# EAGLE board spring_2020_swarm (EAGLE 9.5.2)
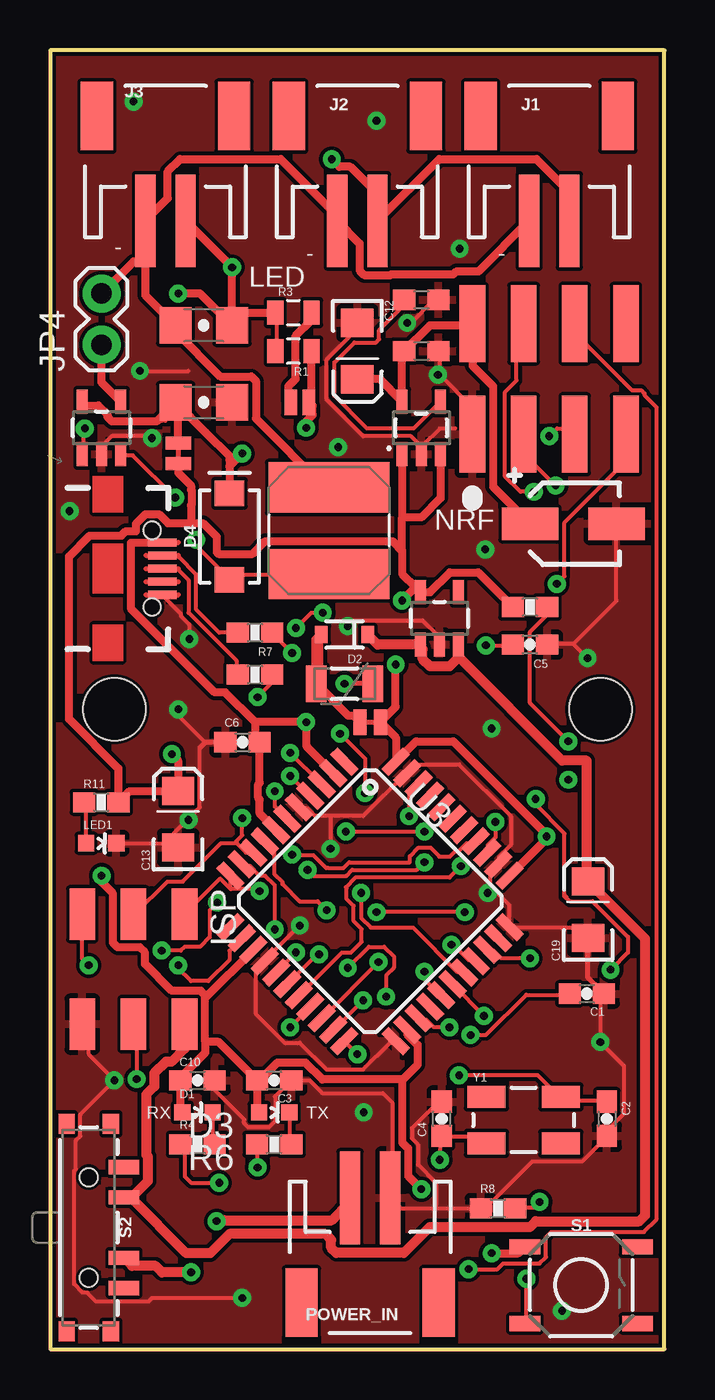
[diagram p0: board, top side]
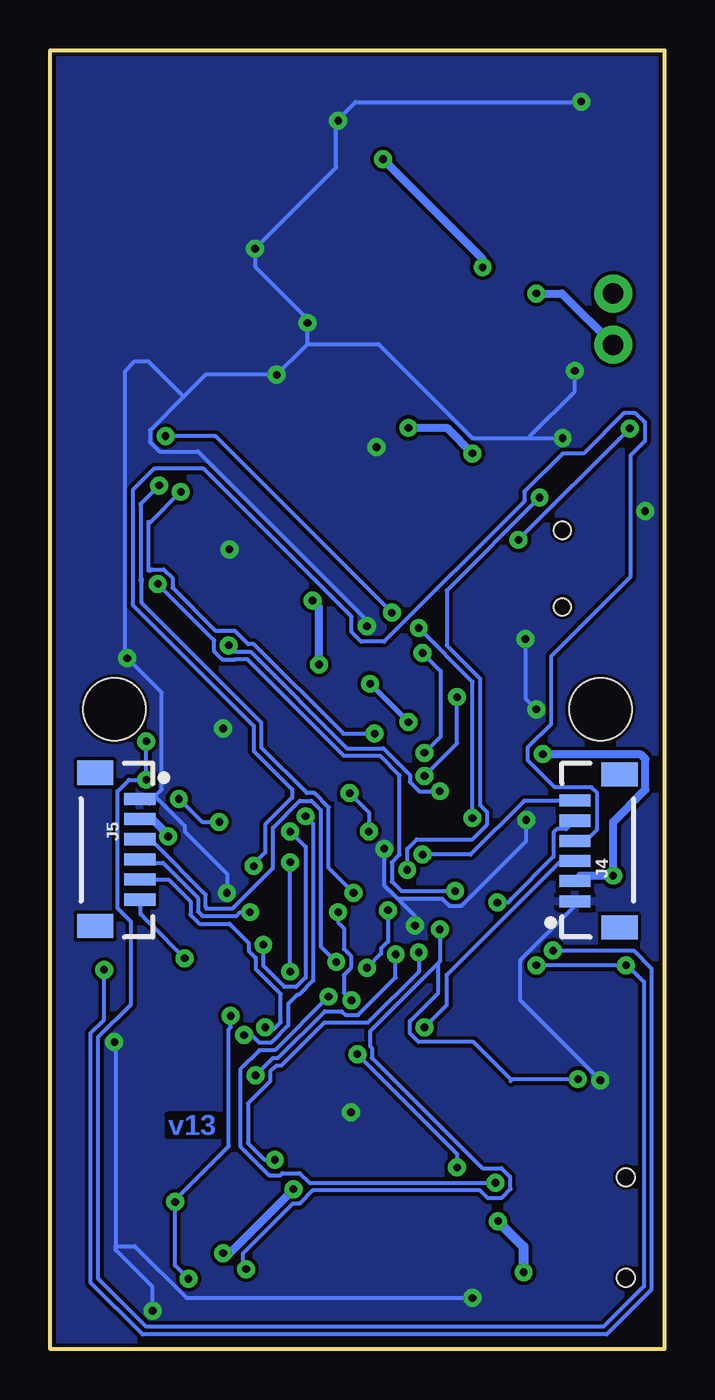
[diagram p1: board, bottom side, seen from below]

Size 30.48 x 64.45 mm. Coordinates in mm from the lower left corner, seen from the top.
Outline: 0,64.45 0,0 30.48,0 30.48,64.45 0,64.45
Copper layers (1*16): Top 0.035mm / dielectric 1.5mm / Bottom 0.035mm
Design rules "SparkFun *": minimum track width 8mil, minimum drill 15mil, track to track 7mil, track to pad 7mil, pad to pad 7mil, via to via 7mil, smd to smd 7mil, copper to edge 7mil, drill to drill 7mil, minimum pad ring 12mil, minimum via ring 10mil, stop-mask expansion 4mil, vias tented up to drill 20mil, thermal gap 10mil
Net classes: 1 power: width 0.508 mm
Holes 3.1 mm at 27.3,31.75 3.17,31.75

## Footprints (pad centres in the part's own frame; a part is rotated, then mirrored left to right if it is on the bottom)
0603-CAP = smd 1.1 x 1: 1 -0.85,0; 2 0.85,0
1206-CAP = smd 1.6 x 1.8: 1 -1.4,0; 2 1.4,0
0603 = smd 1.1 x 1: 1 -0.85,0; 2 0.85,0
EIA3216 = smd 1.4 x 1.6: A 1.4,0; C -1.4,0
LED-0603 = smd 0.8 x 0.8: A 0,-0.75; C 0,0.75
SOD-323 = smd 0.63 x 0.83: 1 -1.15,0; 2 1.15,0
SMA-DIODE = smd 1.27 x 1.47: A -2.15,0; C 2.15,0
PTC-1206 = smd 1 x 1.8: 1 -1.4,0; 2 1.4,0
2X03SMD = smd 2.54 x 1.27: 1 -2.54,2.54; 2 2.92,2.54; 3 -2.54,0; 4 2.92,0; 5 -2.54,-2.54; 6 2.92,-2.54
JST-2-SMD = smd 1 x 4.6: 1 -1,-3.7; 2 1,-3.7 | smd 1.6 x 3.4: NC1 -3.4,1.5; NC2 3.4,1.5
1X06-1MM = smd 0.6 x 1.55: 1 -2.54,1.27; 2 -1.54,1.27; 3 -0.54,1.27; 4 0.46,1.27; 5 1.46,1.27; 6 2.46,1.27 | smd 1.2 x 1.8: P$1 -3.84,-0.955; P$2 3.76,-0.955
SMT-JUMPER_2_NC_TRACE_NO-SILK = smd 0.635 x 1.27: 1 -0.508,0; 2 0.508,0
1X02 = drill 1.016 pad 1.88: 1 0,0; 2 2.54,0
SRN6045 = smd 2.5 x 6: 1 -2.175,-0.175; 2 2.125,-0.175
0805 = smd 0.8 x 1.2: 1 -0.9,0; 2 0.9,0
0603-RES = smd 1.1 x 1: 1 -0.85,0; 2 0.85,0
TACTILE_SWITCH_SMD_5.2MM = smd 1.524 x 0.762: 1 -2.794,1.905; 2 2.794,1.905; 3 -2.794,-1.905; 4 2.794,-1.905
SWITCH_SP3T_SMD = smd 0.7 x 1.5: 1 3,-1.75; 2 1.5,-1.75; 3 -1.5,-1.75; 4 -3,-1.75 | smd 1 x 0.8: P$1 -5.15,-1.1; P$2 -5.15,1.1; P$3 5.15,1.1; P$4 5.15,-1.1 | hole 0.9: 2.5,0; -2.5,0
PAD-JUMPER-2-NO_NO_SILK = smd 0.635 x 1.27: 1 -0.45,0; 2 0.45,0
SOT23-5 = smd 0.55 x 1.2: 1 -0.95,-1.3; 2 0,-1.3; 3 0.95,-1.3; 4 0.95,1.3; 5 -0.95,1.3
TQFP44 = smd 1.5 x 0.5: 1 -5.8,4; 2 -5.8,3.2; 3 -5.8,2.4; 4 -5.8,1.6; 5 -5.8,0.8; 6 -5.8,0; 7 -5.8,-0.8; 8 -5.8,-1.6; 9 -5.8,-2.4; 10 -5.8,-3.2; 11 -5.8,-4; 23 5.8,-4; 24 5.8,-3.2; 25 5.8,-2.4; 26 5.8,-1.6; 27 5.8,-0.8; 28 5.8,0; 29 5.8,0.8; 30 5.8,1.6; 31 5.8,2.4; 32 5.8,3.2; 33 5.8,4 | smd 0.5 x 1.5: 12 -4,-5.8; 13 -3.2,-5.8; 14 -2.4,-5.8; 15 -1.6,-5.8; 16 -0.8,-5.8; 17 0,-5.8; 18 0.8,-5.8; 19 1.6,-5.8; 20 2.4,-5.8; 21 3.2,-5.8; 22 4,-5.8; 34 4,5.8; 35 3.2,5.8; 36 2.4,5.8; 37 1.6,5.8; 38 0.8,5.8; 39 0,5.8; 40 -0.8,5.8; 41 -1.6,5.8; 42 -2.4,5.8; 43 -3.2,5.8; 44 -4,5.8
2.54MM = smd 3.81 x 1.27: 1 0,0; 2 -5.486,0; 3 0,2.54; 4 -5.486,2.54; 5 0,5.08; 6 -5.486,5.08; 7 0,7.62; 8 -5.486,7.62
PANASONIC-CAP-SMD-C = smd 1.6 x 2.794: NEG 0,4.294; POS 0,0
USB-AB-MICRO-SMD-V03-IN&OUT = smd 1.4 x 0.4: D+1 2.7,0; D-1 2.7,0.65; GND1 2.7,-1.3; ID1 2.7,-0.65; VBUS1 2.7,1.3 | hole 0.85: 2.2,1.9; 2.2,-1.9
CRYSTAL-SMD-5X3 = smd 1.9 x 1.1: 1 -1.85,-1.15; 2 1.85,-1.15; 3 1.85,1.15; 4 -1.85,1.15

## Placement (x,y rotation side)
C1  0.1uF  [0603-CAP]  26.63,17.64 180 top
C2  22pF  [0603-CAP]  27.62,11.43 270 top
C3  0.1uF  [0603-CAP]  11.11,13.34 180 top
C4  22pF  [0603-CAP]  19.43,11.43 90 top
C5  1uF  [0603-CAP]  23.81,34.96 180 top
C6  1uF  [0603-CAP]  9.54,30.11 0 top
C7  1uF  [1206-CAP]  7.62,50.8 180 top
C8  2.2uF  [1206-CAP]  7.62,46.99 0 top
C9  0.1uF  [0603]  18.41,49.53 0 top
C10  1uF  [0603-CAP]  7.3,13.34 0 top
C11  4.7uF  [0603]  18.41,52.07 0 top
C12  10uF  [EIA3216]  15.24,49.53 270 top
C13  10uF  [EIA3216]  6.34,26.3 90 top
C19  10uF  [EIA3216]  26.69,21.8 90 top
D1  Yellow  [LED-0603]  7.3,11.75 270 top
D2  [SOD-323]  14.61,35.46 180 top
D3  Green  [LED-0603]  11.11,11.75 270 top
D4  3A/40V/500mV  [SMA-DIODE]  8.89,40.32 90 top
F1  500mA  [PTC-1206]  14.61,33.02 180 top
ISP  [2X03SMD]  4.13,19.05 270 top
J1  [JST-2-SMD]  24.77,59.69 0 top
J2  [JST-2-SMD]  15.24,59.69 0 top
J3  [JST-2-SMD]  5.71,59.69 0 top
J4  [1X06-1MM]  3.17,24.77 90 bottom
J5  [1X06-1MM]  27.3,24.77 270 bottom
JP3  JUMPER-SMT_2_NC_TRACE_NO-SILK  [SMT-JUMPER_2_NC_TRACE_NO-SILK]  6.35,44.45 270 top
JP4  [1X02]  2.54,49.85 90 top
JP5  JUMPER-SMT_2_NC_TRACE_NO-SILK  [SMT-JUMPER_2_NC_TRACE_NO-SILK]  15.88,31.12 0 top
L1  33uH  [SRN6045]  13.65,40.64 90 top
LED1  Red  [LED-0603]  2.53,25.11 270 top
POWER_IN  [JST-2-SMD]  15.88,3.81 180 top
R1  0.3R  [0805]  12.06,49.53 180 top
R2  10K  [0603-RES]  23.81,36.83 180 top
R3  0.3R  [0805]  12.06,51.44 0 top
R4  330  [0603-RES]  7.3,10.16 0 top
R5  22  [0603-RES]  10.16,33.47 180 top
R6  330  [0603-RES]  11.11,10.16 0 top
R7  22  [0603-RES]  10.16,35.56 180 top
R8  10k  [0603-RES]  22.23,6.99 0 top
R11  1K  [0603-RES]  2.53,27.13 0 top
S1  MOMENTARY-SWITCH-SPST-SMD-5.2MM  [TACTILE_SWITCH_SMD_5.2MM]  26.35,3.18 0 top
S2  [SWITCH_SP3T_SMD]  1.9,6.03 90 top
SJ2  NO Jumper  [PAD-JUMPER-2-NO_NO_SILK]  12.38,46.99 180 top
U1  AL8805  [SOT23-5]  2.54,45.72 0 top
U2  MIC5219  [SOT23-5]  19.31,36.27 0 top
U3  32U4  [TQFP44]  15.88,22.23 315 top
U4  3.3V/150mA  [SOT23-5]  18.41,45.72 0 top
U$4  NRFHEADSMD  [2.54MM]  20.95,45.4 270 top
U$5  33uF  [PANASONIC-CAP-SMD-C]  23.81,40.96 270 top
X1  [USB-AB-MICRO-SMD-V03-IN&OUT]  2.86,38.73 0 top
Y1  16MHz  [CRYSTAL-SMD-5X3]  23.5,11.37 0 top

## Library data of the parts
C1-C6 C10 C12 C13 C19 D1-D3 F1 LED1 R2 R4-R8 R11 U2 Y1 = SparkFun
C7 C8 = SparkFun-Capacitors
C9 = SparkFun-Capacitors; PROD_ID: CAP-08604
C11 = SparkFun-Capacitors; PROD_ID: CAP-08280
D4 = SparkFun-DiscreteSemi; PROD_ID: DIO-09886
ISP = fab
J1-J3 POWER_IN = SparkFun-Connectors; PROD_ID: CONN-11443; SF_ID: PRT-08612
J4 J5 = SparkFun-Connectors; PROD_ID: CONN-08249; SF_ID: GPS-00579
JP3 JP5 = SparkFun-Jumpers
JP4 = SparkFun-Connectors
L1 = SparkFun-Passives; PROD_ID: NDUC-11627
R1 R3 = SparkFun-Resistors; PROD_ID: RES-11622
S1 = SparkFun-Switches; PROD_ID: SWCH-08247; SF_SKU: COM-08720
S2 = SparkFun-Switches; PROD_ID: SWCH-10805
SJ2 = SparkFun-Passives
U1 = SparkFun-PowerIC; PROD_ID: IC-11626
U3 = SparkFun-IC-Microcontroller; PROD_ID: IC-11161
U4 = SparkFun-IC-Power; PROD_ID: VREG-00822
U$4 = nrf
U$5 = talkingdrums
X1 = Testing

## Nets
3.3V: C9.1 C12.A U4.5 U$4.2 U$5.POS
A0: J4.5 U3.36
A1: J4.6 U3.37
A2: U3.38
A3: U3.39
A4: U3.40
A5: U3.41
AREF: C1.2 U3.42
D2: J4.3 U3.19
D3: J4.4 U3.18
D4: J5.5 U3.25
D5: J5.6 U3.31
D6/CTRL_CH1: U1.3 U3.27
D7: U3.1
D8/SWITCH: R8.2 S1.3 U3.28
D9/CE: U3.29 U$4.3
D10/CSN: U3.30 U$4.4
D11: U3.12
D12: U3.26
D13: U3.32
D+: R5.1 U3.4
D-: R7.1 U3.3
GND: C1.1 C2.2 C3.1 C4.2 C5.1 C6.1 C8.2 C9.2 C10.2 C11.2 C12.C C13.C C19.C ISP.6 J4.1 J5.1 LED1.C POWER_IN.1 R8.1 U1.2 U2.2 U3.5 U3.15 U3.23 U3.33 U3.35 U3.43 U4.2 U$4.1 U$5.NEG X1.GND1
MISO: ISP.1 U3.11 U$4.7
MOSI: ISP.4 U3.10 U$4.6
N$1: C4.1 U3.16 Y1.1
N$2: C2.1 U3.17 Y1.3
N$3: D2.2 F1.2 JP5.1
N$4: C5.2 U3.6
N$5: D1.C R4.2
N$6: R7.2 X1.D-1
N$7: D3.C R6.2
N$8: R5.2 X1.D+1
N$9: R3.2 SJ2.2
N$12: R4.1 U3.8
N$13: C11.1 U4.4
N$38: LED1.A R11.1
OUT+: C7.1 J1.2 J2.2 J3.2 JP4.1 R1.2 R3.1 U1.4
OUT-: C7.2 J1.1 J2.1 J3.1 JP4.2 L1.2
RAW [power]: C19.A D2.1 ISP.2 S2.2 U2.1 U2.3
RAW_IN: POWER_IN.2 S2.3
RESET: ISP.5 R2.1 U3.13
RXI: J5.3 U3.20
SCK: ISP.3 U3.9 U$4.5
SW: D4.A L1.1 U1.1
TXLED: R6.1 U3.22
TXO: J5.4 U3.21
UVCC: C6.2 F1.1 U3.2 U3.7 X1.VBUS1
VCC: C3.2 C10.1 C13.A D1.A D3.A J4.2 J5.2 JP3.2 JP5.2 R2.2 R11.2 S1.1 U2.5 U3.14 U3.24 U3.34 U3.44 U4.1 U4.3
VIN: C8.1 D4.C JP3.1 R1.1 SJ2.1 U1.5

## Tracks (layer width: path | path; a pad name or v marks a point on that pad's centre or on a via)
3.3V
  Top 0.406: C12.A 16.36,48.13 U4.5 17.46,49.43 C9.1 18.84,50.8 20.95,50.8 U$4.2 20.95,48.8 21.97,47.78 21.97,42.8 U$5.POS
A0  (via drill 0.38)
  Top 0.203: v22.1,26.16 22.1,25.4 21.72,25.02 21.72,24.64 U3.36 | v24.1,27.3 24.1,27.02 25.53,25.59 25.53,22.54 | 25.53,22.45 25.53,22.54 | v5.52,19.78 6.48,19.78 6.67,19.97 7.43,19.97 7.91,20.45 7.91,21.78 v8.29,22.16 | 25.53,22.54 25.61,22.46 25.61,22.39 25.78,22.22 26.92,22.22 28.68,20.46 28.68,19.69 v27.82,18.83 v27.81,18.83
  Bottom 0.203: v22.1,26.16 22.95,26.16 v24.1,27.3 | v27.81,18.83 27.81,16.35 28.48,15.68 28.48,3.3 25.91,0.73 2.86,0.73 0.63,2.95 0.63,18.89 1.52,19.78 v5.52,19.78 | 4.48,26.16 J4.5 4.87,25.8 5.34,25.8 5.5,25.64 5.5,24.45 7.62,22.33 7.62,22.29 7.74,22.16 v8.29,22.16
A1  (via drill 0.38)
  Top 0.203: U3.37 21.05,25.11 20.67,25.11 20.25,24.7 20.08,24.7 19.84,24.45 19.31,24.45 18.87,24.89 18.27,24.89 17.85,24.46 17.85,24.16 14.83,24.16 14.54,23.88 13.97,23.88 13.81,23.88 13.69,23.88 13.06,24.51 12.04,24.51 v12,24.54
  Bottom 0.203: v12,24.54 9.62,24.54 6.95,27.21 4.48,27.21 J4.6
AREF  (via drill 0.38)
  Top 0.203: v20.86,15.59 21.62,15.59 23.62,17.59 25.72,17.59 C1.2 | v17.81,26.45 17.81,27.59 18.19,27.97 U3.42
  Bottom 0.203: v20.86,15.59 20.48,15.59 20.1,15.21 19.53,15.21 18.67,16.07 18.67,17.14 18.22,17.59 18.13,17.59 17.43,18.29 17.43,26.07 v17.81,26.45
D2  (via drill 0.38)
  Top 0.203: v11.91,15.97 12.86,16.92 U3.19
  Bottom 0.203: v11.91,15.97 10.79,17.08 10.79,18.57 5.14,24.23 J4.3
D3  (via drill 0.38)
  Top 0.203: v20.38,23.97 19.81,23.4 15.14,23.4 14.67,22.92 14.71,22.88 14.71,22.34 15.05,22 15.05,21.24 15.45,20.84 15.45,20.21 14.92,19.69 14.47,19.69 U3.18 12.38,17.59
  Bottom 0.203: J4.4 4.38,25.3 3.81,25.3 3.33,25.78 3.33,27.59 3.62,27.88 5.43,27.88 6.76,29.21 6.76,29.88 5.62,31.02 5.62,34.38 1.68,38.33 1.68,44.36 0.95,45.09 0.95,45.97 1.43,46.45 2,46.45 4,44.45 5.05,44.45 6.95,42.55 6.95,42.07 13.91,35.12 15.05,35.12 15.53,35.59 15.53,36.35 22.86,43.69 25.34,43.69 26.38,42.64 26.38,36.92 20.38,30.92 20.38,29.69 18.48,27.78 18.48,27.37 19.81,26.03 19.81,24.64 20.38,24.07 v20.38,23.97
D4  (via drill 0.38)
  Top 0.203: v19.81,15.97 19.05,15.97 18.67,16.35 18.29,16.35 U3.25
  Bottom 0.203: 26.04,23.15 J5.5 | 25.34,23.11 26,23.11 J5.5 | J5.5 24.61,23.3 23.53,22.23 23.53,21.56 23.08,21.11 21.59,21.11 20.63,20.16 20.63,19.77 20.29,19.42 20.29,18.86 19.05,17.62 19.05,16.22 19.38,15.89 19.46,15.97 v19.81,15.97
D5  (via drill 0.38)
  Top 0.203: v23.81,19.4 22.38,19.4 22,19.78 21.72,19.78 U3.31
  Bottom 0.203: v23.81,19.4 25.59,21.17 25.62,21.21 26,21.59 26,22.26 J5.6
D6/CTRL_CH1  (via drill 0.38)
  Top 0.203: v6.19,42.26 4.1,44.36 3.52,44.36 U1.3 | v18.57,18.73 18.57,18.35 19.34,17.59 U3.27 | v12.76,23.78 13.05,23.5 14.7,23.5 14.99,23.78 18.19,23.78 v18.57,24.16
  Bottom 0.203: v12.76,23.78 12.76,24.83 12.29,25.3 9.53,25.3 8.84,25.99 8.84,26.01 8.8,26.05 8.8,26.65 9.14,27 9.14,33.27 10.79,34.92 10.79,37.66 v6.19,42.26 | v18.57,18.73 v18.57,24.16
D8/SWITCH  (via drill 0.38)
  Top 0.203: v24.29,7.3 24,7.02 23.15,7.02 R8.2 | v23.62,3.49 23.62,1.3 S1.3 | v21.53,16.54 20,18.07 U3.28
  Bottom 0.203: v23.62,3.49 24.29,4.16 v24.29,7.3 24.29,7.4 21.62,10.07 21.62,15.88 21.53,15.97 v21.53,16.54
D9/CE  (via drill 0.38)
  Top 0.203: v15.43,22.64 15.43,21.4 15.91,20.92 18,20.92 20.19,18.73 20.48,18.73 U3.29 | 23.72,45.5 23.53,45.69 23.53,45.43 U$4.3 23.5,44.45 v25.08,42.86
  Bottom 0.203: 25.08,42.55 v25.08,42.86 26,41.94 26,38.16 25.95,38.1 | 25.95,38.2 25.95,38.1 | v15.43,22.64 16.67,23.88 16.67,26.89 17.37,27.59 17.75,27.59 20,29.84 20,31.08 25.95,37.03 25.95,38.1
D10/CSN  (via drill 0.38)
  Top 0.203: v19.91,20.07 20,20.07 20.77,19.3 21.05,19.3 U3.30 | v14.67,25.69 v18.57,25.69 | v15.62,27.59 15.62,29.3 v14.38,30.54 | 23.2,50.89 U$4.4 23.15,50.83 23.15,48.07 22.57,47.5 22.57,43.31 23.34,42.55 v24,42.55
  Bottom 0.203: v19.91,20.07 19.91,19.02 18.86,17.97 18.29,17.97 17.81,18.45 17.81,24.92 v18.57,25.69 | v14.67,25.69 14.67,26.64 v15.62,27.59 | v14.38,30.54 15.94,30.54 20.38,34.99 20.66,34.99 21.32,35.65 22.28,35.65 24.42,37.79 24.42,38.27 24.85,38.7 25.45,38.7 25.5,38.64 25.62,38.64 25.62,41.02 | 25.62,41.05 25.62,41.02 | v24,42.55 25.53,41.02 25.62,41.02
D+  (via drill 0.38)
  Top 0.203: v10.29,32.35 10.95,33.02 10.95,33.4 R5.1 | v11.91,28.45 12.86,27.5 U3.4
  Bottom 0.203: v10.29,32.35 10.29,30.07 v11.91,28.45
D-  (via drill 0.38)
  Top 0.203: v12,34.54 11.05,35.5 R7.1 | v11.91,29.59 13.43,28.07 U3.3
  Bottom 0.203: v12,34.54 11.11,33.66 11.11,30.38 v11.91,29.59
GND  (via drill 0.38)
  Top 0.203: POWER_IN.1 17.4,6.99 19.14,6.99 | 19.14,6.99 R8.1 21.43,7.02 21.62,7.02 23.91,9.3 26.38,9.3 27.62,10.54 C2.2 27.62,10.64 27.62,10.83 28.48,11.68 28.48,14.07 27.34,15.21 v27.3,15.24 27.34,15.27 27.34,17.78 27.32,17.8 | 6.13,25.11 LED1.C 3.24,25.02 | 6.13,25.11 C13.C | 26.69,19.69 26.69,19.66 | 16.88,9.49 16.88,7.94 | 16.88,7.94 POWER_IN.1 | 6.13,25.11 6.13,25.59 6.83,26.29 | 6.83,26.29 7.42,26.88 7.42,29.84 | 21.95,22.88 21.81,23.02 21.81,23.59 22.19,23.97 U3.35 22.29,24.07 22.29,24.45 22.86,25.02 22.86,26.45 20.29,29.02 18.1,29.02 17.72,28.64 U3.43 17.62,28.54 15.53,26.45 13.91,26.45 | 21.95,22.88 22.77,22.07 22.77,21.02 U3.33 22.86,20.92 26.1,20.92 | 13.91,26.45 13.14,26.45 12.76,26.83 12.38,26.83 U3.5 | 24.73,35.05 24.68,34.99 | 24.68,34.99 C5.1 | v21.72,22.64 21.95,22.88 | ISP.6 1.59,15.72 1.9,15.4 1.9,14.64 3.14,13.4 v3.17,13.34 3.14,13.3 2.86,13.02 | 19.34,48.35 19.34,49.5 | 19.34,48.35 20.95,46.74 U$4.1 20.86,45.27 | C11.2 19.05,52.07 17.91,50.93 v17.72,50.93 | v19.24,48.35 19.34,48.35 | 2.57,44.39 U1.2 2.57,44.45 2.57,44.83 3.05,45.31 4.95,45.31 v5.05,45.21 | 20.1,45.69 19.34,45.69 18.48,44.83 18.48,44.45 U4.2 18.38,44.83 17.91,45.31 15.53,45.31 13.72,47.12 13.72,49.12 15.24,50.64 C12.C | 8.29,47.02 8.89,47.02 8.95,47.02 | v12.38,21.02 10.67,19.3 U3.15 10.57,19.21 10.19,18.83 10.19,16.64 11.62,15.21 12.38,15.21 13.72,13.88 15.53,13.88 16.86,15.21 17.14,15.21 U3.23 | 13.91,26.45 v13.91,24.83 | v26.67,34.29 25.97,34.99 | 25.97,34.99 24.68,34.99 | 25.97,34.99 28.11,37.13 U$5.NEG | X1.GND1 6.48,36.52 6.48,36.39 6.9,35.97 v6.9,35.24 | v6.35,31.75 6.35,31.45 7.69,30.11
  Top 0.203: v14.76,35.88 15.05,36.16 18.48,36.16 19.24,35.4 19.24,35.02 U2.2 | v9.53,2.54 5.05,2.54 4.86,2.35 2.29,2.35 1.83,2.8 1.6,2.8 1.18,3.23 1.18,8.84 1.27,8.93 1.27,10.35 1.48,10.57 1.48,11.64 2.86,13.02 | 2.57,12.73 2.86,13.02 | v6.86,26.26 6.83,26.29 | v4.45,48.55 6.86,48.55 | 19.43,12.07 19.43,12.26 C4.2 19.27,12.28 17.95,10.96 17.95,10.46 18.24,10.17 18.24,9.16 19.14,8.26 19.14,7.02 19.14,6.99 | C10.2 8.19,13.3 8.19,12.83 9.62,11.4 9.62,11.21 9.81,11.02 10.86,11.02 11.14,11.3 11.14,12.54 11.91,13.3 C3.1 | 12.29,13.3 12,13.3 C3.1 | 16.86,9.59 POWER_IN.1 | C3.1 12.87,13.34 13.5,12.7 16.51,12.7 16.98,12.23 16.98,8.04 16.88,7.94
  Top 0.254: C6.1 7.69,30.11 7.42,29.84 | C1.1 27.32,17.8 26.69,18.43 26.69,19.69 C19.C
  Bottom 0.203: v21.72,22.64 21.72,23.59 23.81,25.69 23.81,25.97 25.24,27.4 | 25.24,27.4 25.29,27.45 24.96,27.78 24.96,32.58 v26.67,34.29 26.77,34.26 26.77,48.55 26.29,49.02 25.62,49.02 23.91,47.31 23.86,47.26 | 17.72,49.88 v17.72,50.93 | 17.72,49.88 17.86,49.74 v19.24,48.35 19.34,48.35 22.77,48.35 23.86,47.26 | v12.38,21.02 12.38,21.5 13.38,22.5 | 13.38,22.5 13.91,23.02 v13.91,24.83 | 25.24,27.4 25.57,27.07 25.62,27.12 25.81,27.12 26,27.3 J5.1 | v6.9,35.24 6.9,32.3 v6.35,31.75 | 17.72,51.02 v17.72,50.93 | v14.76,35.88 14.76,36.16 23.15,44.55 25.05,44.55 25.53,45.02 25.53,45.59 23.86,47.26 | v25.4,1.91 25.43,1.97 25.43,3.11 27.24,4.92 27.24,5.02 27.24,5.11 | 27.24,15.21 v27.3,15.24 27.24,15.11 27.24,5.11 | v6.86,26.26 6.86,25.21 10.1,21.97 10.64,21.97 11.02,22.35 13.24,22.35 13.38,22.5 | 6.67,45.21 9.53,45.21 14.19,49.88 17.62,49.88 17.72,49.88 | 6.67,45.21 v5.05,45.21 | v4.45,48.55 4.45,47.53 6.67,45.31 6.67,45.21 | J4.1 4.48,22.16 4.48,21.97 7.14,19.3 7.14,17.3 3.24,13.4 v3.17,13.34 | v4.13,61.91 4.19,61.88 15.33,61.88 16.19,61.02 v16.19,60.96 16.29,60.93 16.29,58.64 20.29,54.64 v20.32,54.61 20.29,54.55 20.29,53.69 17.72,51.12 v17.72,50.93 | v9.53,2.54 23.72,2.54 26.29,5.11 27.15,5.11 27.24,5.11
  other vias: 15.56,11.75 21.59,39.69 21.91,30.8 14.29,44.77 0.95,41.59
  pour Top: -16.51,66.04 39.69,66.04 39.69,-3.81 -16.51,-3.81
  pour Bottom: -26.04,67.95 47.31,67.95 47.31,-6.35 -26.04,-6.35
MISO  (via drill 0.38)
  Top 0.203: ISP.1 8.43,23.35 8.91,22.88 | 8.91,22.88 8.95,22.91 U3.11 | v10.38,22.73 10.29,22.83 8.95,22.83 8.91,22.88 | 28.57,45.02 28.57,45.69 U$4.7 28.57,44.93 28.57,44.07 25.53,41.02 25.53,38.35 v25.15,37.97
  Bottom 0.203: v10.38,22.73 13.05,22.73 13.53,23.21 13.53,24.16 13.14,24.54 13.14,28.48 14.1,29.44 15.91,29.44 20.7,34.23 21.3,34.23 21.32,34.2 21.92,34.2 22.35,34.62 22.35,35.17 v25.15,37.97
MOSI  (via drill 0.38)
  Top 0.203: 26,50.74 26,50.8 U$4.6 | v11.14,20.83 11.14,23.02 10.67,23.5 10.38,23.5 9.91,23.97 9.53,23.97 U3.10 | v4.29,13.4 4.29,15.97 4.19,16.07 ISP.4 | v20.77,3.97 22.19,3.97 22.48,4.25 24.29,4.25 24.6,4.57 24.6,5.55 24.77,5.71 24.87,5.82 29.47,5.82 30.1,6.45 30.1,46.74 29.49,47.35 29.49,47.42 29.33,47.59 28.87,47.59 26,50.45 26,50.64 U$4.6 | 26.05,50.79 U$4.6
  Bottom 0.203: v4.29,13.4 7.62,13.4 | 7.62,7.97 7.64,7.95 | 7.64,7.95 8.1,7.49 8.76,7.49 9.14,7.87 17.45,7.87 18.12,7.21 18.46,7.21 20.93,4.74 20.93,4.13 v20.77,3.97 20.77,4.32 | 7.62,13.3 7.62,13.4 | v11.14,20.83 11.14,19.24 11.22,19.16 | 7.64,7.95 7.66,7.98 7.66,8.55 8.08,8.98 9.04,8.98 14.52,14.45 14.52,14.94 14.61,15.03 14.61,15.78 11.22,19.16 | 7.62,13.4 9.47,15.25 12.21,15.25 12.63,15.67 12.63,16.27 11.22,17.68 11.22,19.16
N$1  (via drill 0.38)
  Top 0.203: Y1.1 21.62,10.26 21.34,10.54 19.43,10.54 C4.1 19.34,10.54 v19.34,9.4 | v12.19,19.69 11.24,18.73 U3.16
  Bottom 0.203: v12.19,19.69 12.19,18.73 14.73,16.19 16.89,16.19 19.02,14.07 19.27,14.07 19.56,13.77 19.56,13.29 20.67,12.18 20.67,10.22 19.84,9.4 v19.34,9.4
N$2  (via drill 0.38)
  Top 0.203: C2.1 27.62,12.35 25.53,12.35 25.43,12.45 Y1.3 25.24,12.54 24.19,13.59 v20.29,13.59 | v13.34,19.59 13.24,19.59 11.81,18.16 U3.17
  Bottom 0.203: v13.34,19.59 13.34,18.45 15.2,16.58 15.83,16.58 16.02,16.77 16.85,16.77 19.18,14.45 19.43,14.45 v20.29,13.59
N$3
  Top 0.203: 13.46,33.02 F1.2 13.43,33.24 13.46,33.27 D2.2
  Top 0.406: JP5.1 15.05,31.43 | 15.05,31.43 14.92,31.43 | 15.05,31.43 14.79,31.43 F1.2
  Top 0.508: 13.43,33.02 13.43,33.24 | F1.2 13.21,35.21 D2.2 | JP5.1 15.33,31.12
N$4  (via drill 0.38)
  Top 0.203: v11.14,27.69 11.14,26.92 11.72,26.35 U3.6 | v21.62,34.92 22.95,34.92 C5.2
  Bottom 0.203: v21.62,34.92 21.3,34.61 20.54,34.61 15.75,29.82 13.95,29.82 12.63,28.51 12.63,28.15 12.17,27.69 v11.14,27.69
N$5
  Top 0.203: D1.C 8.05,10.26 R4.2
N$6
  Top 0.203: 5.8,39.38 X1.D-1 6.38,39.31 7.24,38.45 7.24,36.7 8.38,35.56 R7.2 9.24,35.59 9.24,35.97
N$7
  Top 0.203: D3.C 11.91,11.68 11.91,10.16 R6.2
N$8
  Top 0.203: R5.2 9.24,33.5 9.24,34.16 6.86,36.54 6.86,38.16 6.38,38.64 X1.D+1
N$9
  Top 0.406: SJ2.2 11.82,47.11 11.82,47.78 12.18,48.15 12.18,50.29 12.96,51.07 R3.2
N$12  (via drill 0.38)
  Top 0.203: v16.67,17.49 16.67,18.54 17.05,18.92 17.05,19.49 16.57,19.97 15.81,19.97 v14.76,18.92 | 6.48,10.16 R4.1 6.67,9.95 6.67,8.57 6.98,8.26 v8.38,8.26 | 10.67,25.11 U3.8 11.11,24.73 11.11,23.59 11.52,23.18 11.52,23.08 12.38,22.23 13.27,22.23 v13.72,21.78
  Bottom 0.203: v8.38,8.26 17.62,8.26 18.1,8.73 18.95,8.73 19.05,8.64 19.62,8.64 21.05,10.07 21.05,13.88 20.1,14.83 19.34,14.83 v16.67,17.49 | v13.72,21.78 13.72,20.23 14.06,19.89 14.06,19.63 v14.76,18.92
N$13
  Top 0.203: 14.1,48.89 14.1,47.31 15.72,45.69 18.03,45.69 U4.4 19.34,46.93 | 14.1,48.89 14.1,48.93 | C11.1 17.53,52.07 17.53,51.78 16.32,50.58 16.32,50.11 16.16,49.95 15.09,49.95 14.1,48.96 14.1,48.89
N$38
  Top 0.203: LED1.A 1.78,27.04 R11.1
OUT+  (via drill 0.38)
  Top 0.203: R1.2 11.24,49.59 11.24,51.31 R3.1
  Top 0.406: J1.2 25.77,57.42 24.13,59.05 19.3,59.05 J2.2 16.24,57.33 14.9,58.67 14.35,58.67 v13.97,59.05 | C7.1 v9.02,53.69 J3.2 | U1.4 2.54,47.97 JP4.1 | C7.1 7.43,52.39 v6.35,52.39 | C7.1 9.65,51.44 R3.1
  Bottom 0.406: v13.97,59.05 9.02,54.1 v9.02,53.69 | v6.35,52.39 5.08,52.39 JP4.1
OUT-
  Top 0.406: 4.71,53.98 J3.1 5.83,57.11 5.83,58.45 6.44,59.05 11.43,59.05 14.24,56.24 J2.1 15.36,54.87 15.36,53.53 15.58,53.31 16.9,53.31 16.93,53.34 20.01,53.34 20.16,53.49 21.27,53.49 J1.1 | 4.71,53.98 4.71,52.3 C7.2 6.22,50.48 8.43,48.27 9.98,48.27 10.2,48.05 10.2,46.18 13.62,42.77 L1.2 | JP4.2 4.13,53.98 4.71,53.98
RAW
  Top 0.508: S2.2 3.69,7.5 4.01,7.5 | D2.1 16.25,34.97 U2.1 18.48,34.73 18.48,34.26 18.86,33.88 19.81,33.88 20.27,34.34 | 20.27,34.34 25.4,29.21 26.61,29.21 26.61,23.28 C19.A 29.53,20.37 29.53,6.63 29.25,6.35 24.1,6.35 23.8,6.05 18.83,6.05 17.55,4.78 14.2,4.78 13.94,5.03 13.94,5.42 13.65,5.71 8.89,5.71 7.94,4.76 6.74,4.76 4.01,7.5 | 20.27,34.34 20.26,34.35 U2.3 | 4.15,7.5 4.01,7.5 | 6.67,15.3 ISP.2 6.67,14.92 6.01,14.27 5.72,14.27 5.16,13.71 5.16,13.04 4.76,12.64 4.76,9.64 4.84,9.56 4.84,8.33 4.01,7.5
RAW_IN  (via drill 0.38)
  Top 0.406: POWER_IN.2 14.88,7.3 14.88,6.62
  Top 0.508: S2.3 4.06,4.13 5.22,4.13 5.54,3.81 v6.98,3.81 | v8.25,6.35 8.55,6.35 8.61,6.4 13.97,6.4 14.88,7.3
  Bottom 0.508: v8.25,6.35 6.98,5.08 v6.98,3.81
RESET  (via drill 0.38)
  Top 0.203: ISP.5 1.59,19.37 v1.9,19.05 | 24.73,36.83 R2.1 24.67,36.73 24.67,36.45 23.81,35.59 23.81,32.07 v25.72,30.16 | v25.72,28.26 25.43,28.26 | 9.09,19.97 U3.13 8.89,19.77 8.89,19.32 7.84,18.26 6.98,18.26 6.35,18.9 v6.35,19.05
  Bottom 0.203: v6.35,19.05 v1.9,19.05 1.81,19.02 1.02,18.23 1.02,3.11 3.02,1.11 25.72,1.11 28.1,3.49 28.1,15.49 26.48,17.11 26.48,21.21 27.15,21.88 27.15,27.69 26.57,28.26 v25.72,28.26 v25.72,30.16
RXI  (via drill 0.38)
  Top 0.203: v16.29,19.21 13.53,16.45 U3.20
  Bottom 0.203: 26.04,25.15 J5.3 26,25.11 25.34,25.11 22.77,22.54 22.77,21.97 22.77,21.88 21.43,21.88 19.43,23.88 19.43,25.88 18.1,27.21 17.53,27.21 17.05,26.73 17.05,19.97 v16.29,19.21
SCK  (via drill 0.38)
  Top 0.203: 9.24,25.11 9.71,24.64 10,24.64 U3.9 | 9.24,25.11 8.48,25.11 6.57,23.21 5.81,23.21 4.19,21.59 ISP.3 | v24.77,45.31 25.15,45.69 25.75,45.69 U$4.5 | v13.53,36.54 12.95,36.54 v12.19,35.78 | v9.53,26.35 9.53,25.5 9.24,25.21 9.24,25.11
  Bottom 0.203: v24.77,45.31 22.29,45.31 v13.53,36.54 | v12.19,35.78 9.53,33.12 v9.53,26.35
SW  (via drill 0.38)
  Top 0.203: v1.71,45.69 1.62,45.59 1.62,44.45 U1.1 | v7.24,40.16 7.24,39.88 8.86,38.26 D4.A 8.95,38.26 9.14,38.45 13.81,38.45 L1.1
  Bottom 0.203: v7.24,40.16 v1.71,45.69
TXLED  (via drill 0.38)
  Top 0.203: v10.29,9.02 10.29,10.16 R6.1 | v15.24,14.64 14.67,15.21 U3.22
  Bottom 0.203: v10.29,9.02 10.29,9.68 v15.24,14.64
TXO  (via drill 0.38)
  Top 0.203: v15.53,17.3 14.1,15.88 U3.21 | v20.57,21.69 v16.19,21.69
  Bottom 0.203: v20.57,21.69 21.05,21.69 21.24,21.5 22.92,21.5 23.15,21.72 23.15,22.38 24.89,24.13 25.86,24.13 J5.4 26,24.26 25.43,24.26 | v16.19,21.69 16.19,21.18 15.91,20.89 15.91,19.85 15.56,19.51 15.56,18.91 15.91,18.57 15.91,17.69 v15.53,17.3
UVCC  (via drill 0.38)
  Top 0.254: F1.1 v14.61,33.02 | 13.69,28.93 U3.2 | 10.16,30.48 10.16,30.34 C6.2 10.39,29.84
  Top 0.406: 10.16,31.12 8.68,32.59 8.16,32.59 3.99,36.76 3.99,40.01 5.53,40.01 X1.VBUS1 | 10.16,31.12 10.16,30.48 | 13.69,28.93 12.73,29.89 12.73,29.93 12.7,29.96 v12.7,31.12 10.16,31.12 | U3.7 10.39,26.58 10.39,27.27 10.32,27.34 10.32,28.03 10.39,28.1 10.39,29.84
  Bottom 0.254: v14.61,33.02 v12.7,31.12
VCC  (via drill 0.38)
  Top 0.406: U3.14 7.68,17.43 | 7.68,15.24 7.68,17.43 | 7.68,15.24 7.68,14.7 6.45,13.47 C10.1 6.45,11.85 D1.A | 10.21,13.39 C3.2 10.26,11.85 D3.A | 10.21,13.39 8.36,15.24 7.68,15.24 | U3.24 17.71,15.62 18.24,15.1 18.24,14.11 17.46,13.34 | 17.46,13.34 17.41,13.39 13.5,13.39 12.67,14.22 11.25,14.22 10.43,13.39 10.21,13.39 | v18.41,7.94 17.76,8.6 17.76,9.97 17.46,10.26 17.46,13.34 | v21.91,4.76 23.24,4.76 S1.1 | U4.1 17.46,41.27 | 18.12,37.81 17.46,38.47 17.46,39.62 | 18.12,37.81 U2.5 18.85,37.57 19.83,38.55 21.24,38.55 R2.2 | U4.3 19.37,42.23 18.41,41.27 17.46,41.27 | 6.16,43.94 JP3.2 6.35,43.5 6.98,42.86 6.98,42.63 7.02,42.6 7.02,41.92 6.98,41.89 6.98,40.99 | v17.14,33.97 17.14,31.88 JP5.2 17.15,30.35 U3.44 18.16,30.16 20,30.16 24.64,25.53 v24.64,25.44 24.64,25.33 U3.34 | v17.46,37.15 18.12,37.81 | v2.54,23.5 2.54,23.18 3.11,22.61 3.11,20.32 3.11,20.16 3.33,19.94 4.45,19.94 4.7,19.69 4.7,19.11 6.03,17.78 7.46,17.78 7.68,17.56 7.68,17.43 | v6.03,29.53 6.34,29.22 C13.A 3.94,27.7 R11.2 3.38,28.82 0.93,31.27 0.93,39.34 1.95,40.37 3.52,40.37 3.75,40.59 4.25,40.59 4.25,40.97 4.72,41.44 5.39,41.44 5.84,40.99 6.98,40.99 | 6.98,40.99 7.58,40.99 8.25,40.31 8.25,39.55 8.34,39.46 10.03,39.46 10.67,40.1 16.98,40.1 17.46,39.62 | 17.46,39.62 17.46,41.27
  Bottom 0.406: v18.41,7.94 21.59,4.76 v21.91,4.76 | v17.14,33.97 17.14,36.83 v17.46,37.15 | v24.64,25.44 24.88,25.68 24.88,25.76 25.42,26.3 J5.2 | J4.2 4.17,23.5 v2.54,23.5 2.54,26.17 0.94,27.77 0.94,29.28 1.16,29.51 6.01,29.51 v6.03,29.53
VIN  (via drill 0.38)
  Top 0.203: 4.38,46.07 5.52,46.07 5.71,46.07 | 4.38,46.07 3.14,46.07 | 4.38,46.07 4.38,46.04
  Top 0.406: R1.1 12.96,47.12 SJ2.1 13.02,46.8 13.02,46.35 12.7,46.04 v12.7,45.72 | C8.1 7.71,45.5 8.89,44.32 8.89,44.13 D4.C 8.89,43.81 v9.53,44.45 | C8.1 5.71,46.48 C8.1 | JP3.1 6.35,46.86 C8.1 | U1.5 1.78,46.83 2.38,46.83 2.83,46.38 2.83,46.26 3.06,46.04 4.38,46.04 5.27,46.04 C8.1
  Bottom 0.406: v12.7,45.72 10.79,45.72 v9.53,44.45

## Text on the board
Bottom: v13
tPlace: - | - | - | LED | NRF | RX | TX
tValues: Valid combinations: | 3.3V Reg / 8MHz | 5V Reg / 16MHz | Mark back accordingly